# Altium PCB rectifier_buck_pcb.PcbDoc
Units mil, origin at the board's own origin, x right, y up, seen from the top; angles counter-clockwise.
Board outline 4645.67 x 3725 mil, 2 copper layers (Top Layer, Bottom Layer); 34 components, 20 nets, 108 pads, 7 vias.
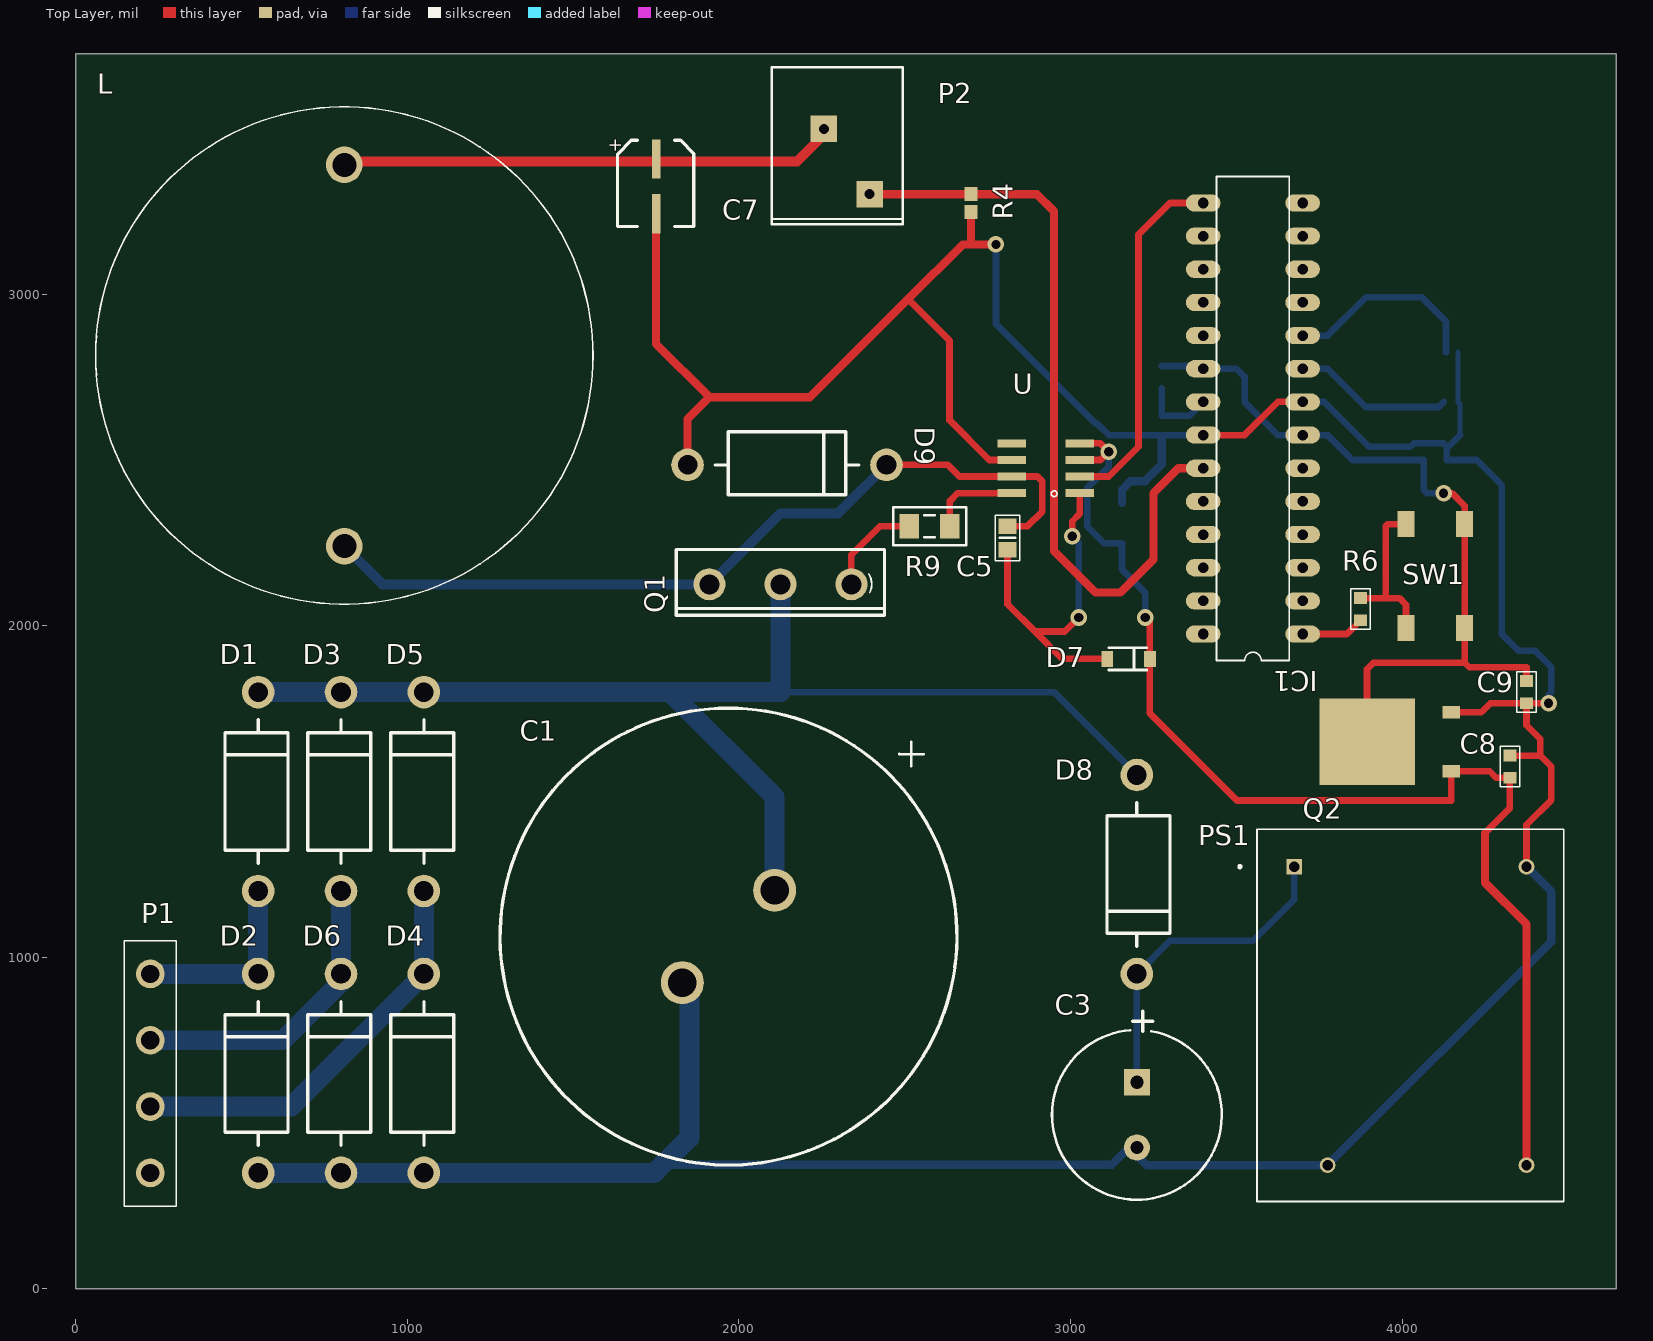
[diagram p0: Top Layer view]
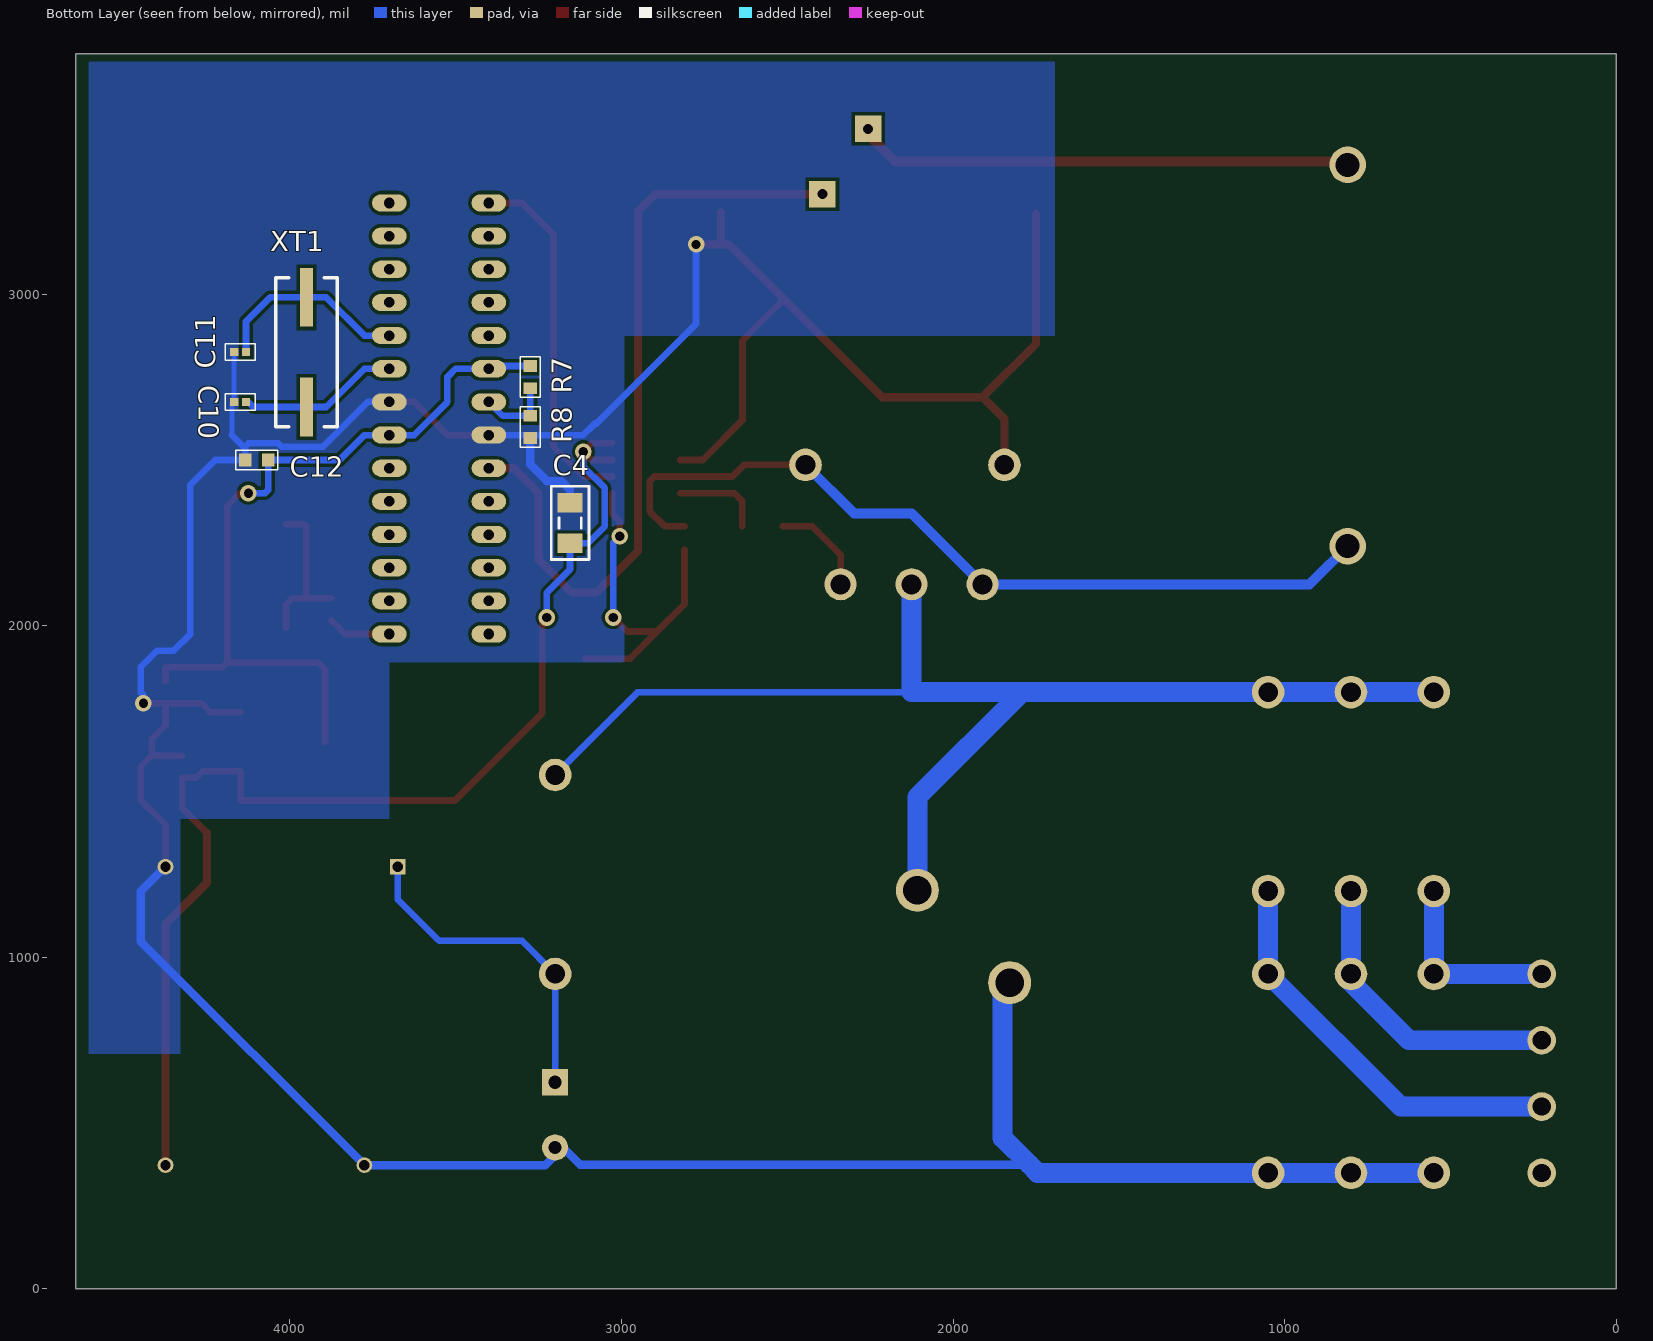
[diagram p1: Bottom Layer view, seen from below]
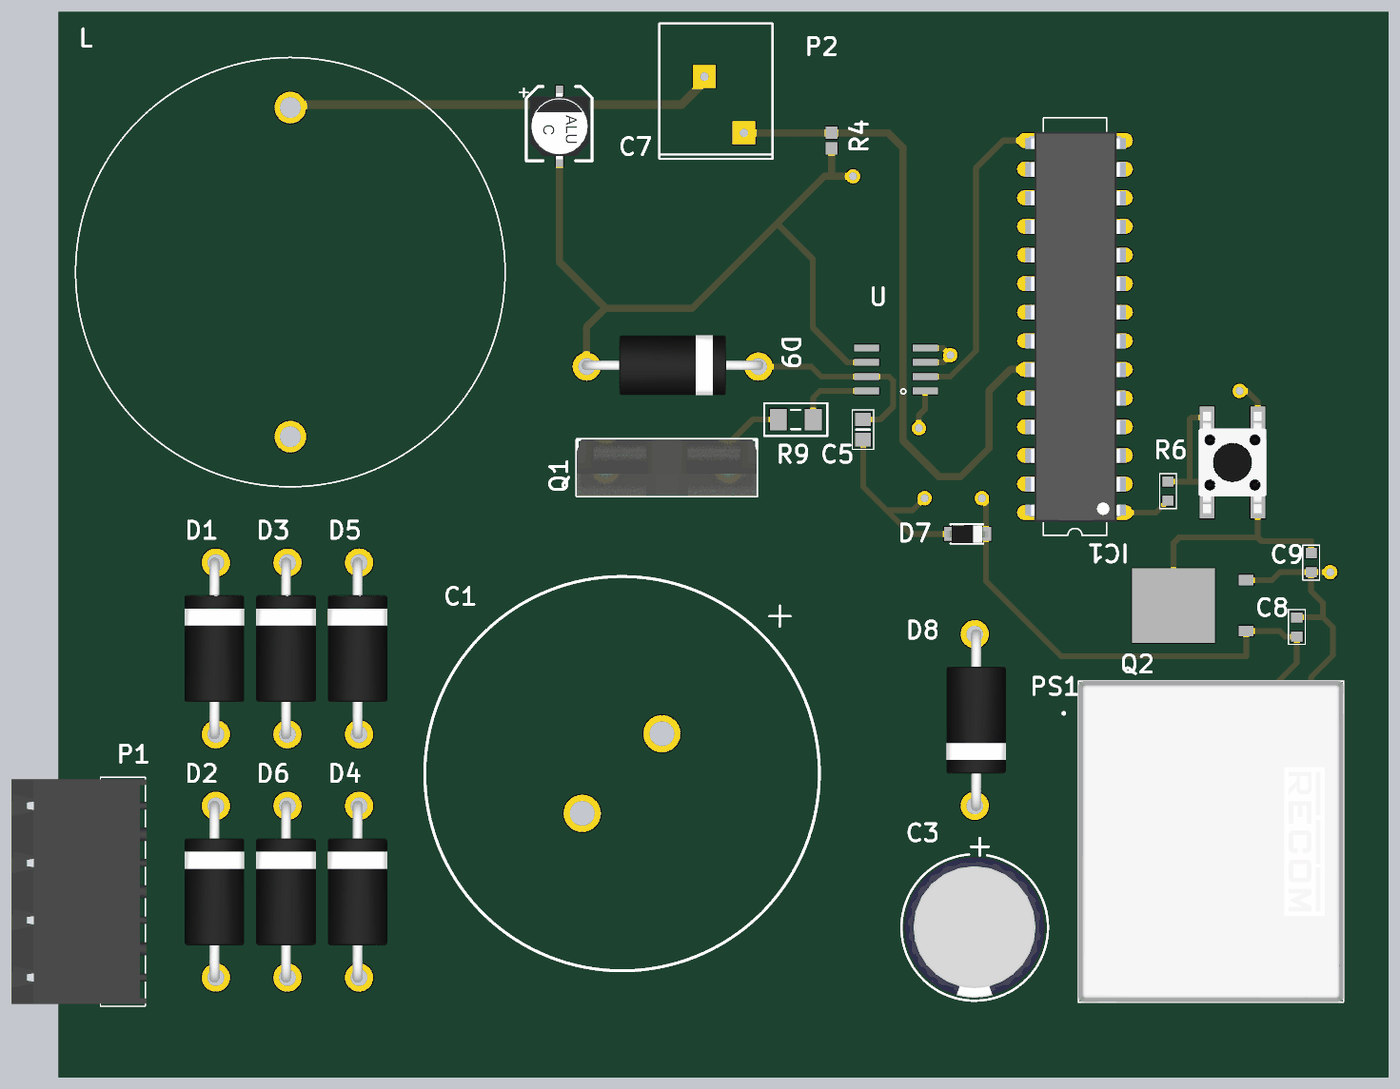
[diagram p2: 3D render of the assembled board from above, using the file's embedded part models]
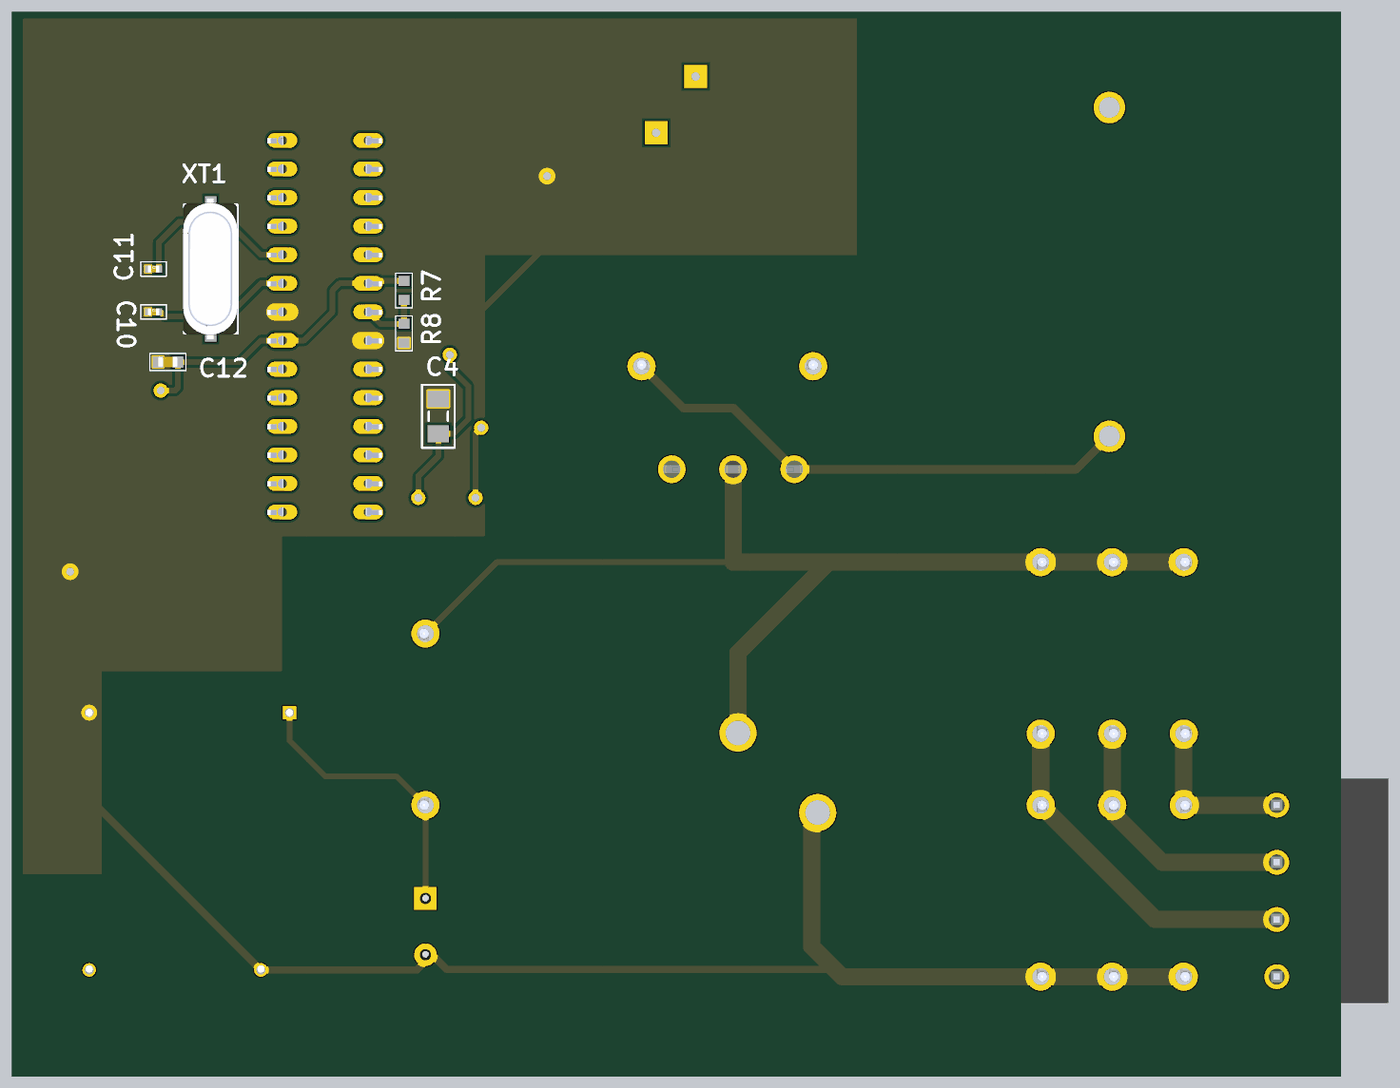
[diagram p3: 3D render of the assembled board from below, using the file's embedded part models]

## Layer stack, top to bottom
Top Solder: solder mask 0.4, Solder Resist, Dk 3.5
Top Layer: signal copper 1.4
Dielectric 1: dielectric 12.6, FR-4, Dk 4.8
Bottom Layer: signal copper 1.4
Bottom Solder: solder mask 0.4, Solder Resist, Dk 3.5

## Board outline
0,0 4645.67,0 4645.67,3725 0,3725

## Design rules (kind name [scope] priority, off if disabled: settings)
Clearance [All] p1: gap=10
Height [All] p1: minheight=0 maxheight=3937.01 prefheight=500
MinimumSolderMaskSliver [All] p1: minsoldermaskwidth=3
PlaneConnect [All] p1: planeconnectstyle=Relief reliefexpansion=10 reliefentries=4 reliefconductorwidth=10 reliefairgap=10
PolygonConnect [All] p1: connectstyle=Direct reliefconductorwidth=10 reliefentries=4 polygonreliefangle="90 Angle" airgapwidth=10
RoutingVias [All] p1: holewidth=28 width=50 viastyle="Through Hole" minholewidth=28 minwidth=50 maxholewidth=28 maxwidth=50
SolderMaskExpansion [All] p1: expansion=4
UnpouredPolygon [All] p1: allowunpoured=FALSE
Width [All] p1: maxlimit=100 minlimit=10 preferedwidth=30
26 further rules are at their usual default settings.

## Classes and differential pairs
component class Rectifier: C1 D1 D2 D3 D4 D5 D6 P1
component class Buck: C3 C4 C5 C7 C8 C9 C10 C11 C12 D7 D8 D9 IC1 L P2 PS1 Q1 Q2 R4 R6 R7 R8 R9 SW1 U U1 XT1

## Components (designator, comment, footprint, x,y, rotation, side; value= is the part's Value field where it differs from the comment)
C1 "ESMQ401VSN821MA45S" ESMQ401VSN821MA45S 1968.5,1062.99 r90 top
C3 "EEUED2G220" CAP-12.25X25 3200,525 r270 top
C4 "MC1206B106K160CT" 1206 3155,2310 r90 bottom
C5 "C2012X7R1C225K" 0805 2810,2265 r90 top
C7 "CAP ALUM 22UF 20% 35V SMD 5X5.3X5.4" RAD5.3X5.3X5.0 1750,3325 r180 top
C8 "*Value" 0603 4325,1575 r270 top
C9 "*Value" 0603 4375,1800 r90 top
C10 "CAP CER 22PF 5% 50V NP0 SMD 0402" C0402N 4150,2675 r180 bottom
C11 "CAP CER 22PF 5% 50V NP0 SMD 0402" C0402N 4150,2825 r180 bottom
C12 "CAP CER 0.1UF 10% 16V X7R SMD 0603" C0603N 4100,2500 r0 bottom
D1 "DIODE GEN PURP 400V 3A DO201AD - 1N5404" DO201AD 550,1500 r90 top
D2 "DIODE GEN PURP 400V 3A DO201AD - 1N5404" DO201AD 550,650 r90 top
D3 "DIODE GEN PURP 400V 3A DO201AD - 1N5404" DO201AD 800,1500 r90 top
D4 "DIODE GEN PURP 400V 3A DO201AD - 1N5404" DO201AD 1050,650 r90 top
D5 "DIODE GEN PURP 400V 3A DO201AD - 1N5404" DO201AD 1050,1500 r90 top
D6 "DIODE GEN PURP 400V 3A DO201AD - 1N5404" DO201AD 800,650 r90 top
D7 "MMSZ4699T1G-12V" SOD123 3175,1900 r180 top
D8 "DIODE GEN PURP 400V 3A DO201AD - 1N5404" DO201AD 3200,1250 r270 top
D9 "DIODE GEN PURP 400V 3A DO201AD - 1N5404" DO201AD 2145,2485 r0 top
IC1 "ATMEGA328-PU" DIL28 3550,2625 r180 top
L "1140-152K-RC" INDRD2921W163D3810H2616P 810,2815 r90 top
P1 "CTB9358/4AO" CTB9350/4AO 225,650 r270 top
P2 "Konnektör" 250-202 2325,3400 r0 top
PS1 "RAC03-12SK" CONV_RAC03-12SK 4025,825 r0 top
Q1 "LSIC1MO120E0080" TO-247-3L 2125,2125 r180 top
Q2 "L78M12ABDT" TO225P972X240-3N 3900,1650 r90 top
R4 "PE0603FRF070R1L" RESC1507X55N 2700,3275 r270 top
R6 "ERJ3GEYJ103V" 0603 3875,2050 r90 top
R7 "Resistor" 0603 3275,2750 r90 bottom
R8 "MC0063W06031100K" 0603 3275,2600 r270 bottom
R9 "*Value" 1206 2575,2300 r180 top
SW1 "SWITCH TACTILE" SWITCH_TACHTILE_SMD 4100,2150 r270 top
U "NCP3420" SO08 2925,2475 r90 top
XT1 "CRYSTAL 16MHZ 18PF" "XTAL_11.4MMX 4.7MM" 3950,2825 r90 bottom

## Footprints (in the part's own frame and the unit in brackets; to place one, negate y for a bottom-side part, rotate by r counter-clockwise, add the part's x,y. Pads: shape width x height; smd on the part's side, far side on the other; paste and mask are expansions set on the pad)
250-202 [mil] "2 pos wago power connector"
  rect 80x80 hole 30 mask+3.94: 1(-68.9,98.43) 2(68.9,-98.43)
  silkscreen extent -226,-189 169,284, body extent -230,-192 172,288, height 520
0603 [mm] "Chip Resistor, Body 1.6x0.8mm, IPC Medium Density"
  rect 0.9x1 smd: 1(-0.85,0) 2(0.85,0)
  silkscreen extent -1.55,-0.75 1.55,0.75, body extent -0.85,-0.48 0.85,0.48, height 0.6
0805 [mm] "Chip Resistor, Body 2.0x1.3mm, IPC Medium Density"
  rect 1.2x1.4 smd: 1(-0.9,0) 2(0.9,0)
  silkscreen extent -1.75,-0.95 1.75,0.95, body extent -1.07,-0.7 1.07,0.7, height 0.65
1206 [mm] "Chip Component, Body 3.2x1.6mm, IPC Low Density"
  rect 1.5x1.9 smd: 1(-1.55,0) 2(1.55,0)
  silkscreen extent -2.8,-1.45 2.8,1.45, body extent -1.68,-0.87 1.68,0.87, height 0.71
C0402N [mm] "Chip Capacitor, Body 1.0x0.5mm, IPC Medium Density"
  rect 0.62x0.62 smd: 1(-0.45,0) 2(0.45,0)
  silkscreen extent -1.14,-0.64 1.14,0.64, body extent -0.5,-0.3 0.5,0.3, height 0.2
C0603N [mm] "Chip Capacitor, 0603, Body 1.6x0.8mm, IPC Medium Density"
  rect 0.95x1 smd: 1(-0.875,0) 2(0.875,0)
  silkscreen extent -1.6,-0.76 1.6,0.76, body extent -0.89,-0.48 0.88,0.47, height 0.98
CAP-12.25X25 [mm] "Capacitor; 2 Leads,5 mm lead distance"
  rect 2x2 hole 1: 1(-2.5,0)
  round 2 hole 1: 2(2.5,0)
  silkscreen extent -7.93,-6.5 6.5,6.5, body extent -6.28,-6.27 6.22,6.23, height 25.49
CONV_RAC03-12SK [mm]
  rect 1.2x1.2 hole 0.8: 1(-8.89,11.39)
  round 1.2 hole 0.8: 2(-6.35,-11.47) 3(8.89,-11.47) 4(8.89,11.39)
  silkscreen extent -13.16,-14.25 11.75,14.25, body extent -11.75,-14.25 11.75,14.25, height 17.9
CTB9350/4AO [mm] "4 position pluggable termial(90 degree)"
  round 2.2 hole 1.4: 1(-7.62,0) 2(-2.54,0) 3(2.54,0) 4(7.62,0)
  silkscreen extent -10.16,-2 10.16,2, body extent -9.97,-9.9 9.95,2.1, height 9
DIL28 [mil]
  oval 104x52 hole 32: 1(-150,650) 2(-150,550) 3(-150,450) 4(-150,350) 5(-150,250) 6(-150,150) 7(-150,50) 8(-150,-50) 9(-150,-150) 10(-150,-250) 11(-150,-350) 12(-150,-450) 13(-150,-550) 14(-150,-650) 15(150,-650) 16(150,-550) 17(150,-450) 18(150,-350) 19(150,-250) 20(150,-150) 21(150,-50) 22(150,50) 23(150,150) 24(150,250) 25(150,350) 26(150,450) 27(150,550) 28(150,650)
  silkscreen extent -110,-730 110,730, body extent -202,-681 198,684, height 180
DO201AD [mm]
  round 2.5 hole 1.5: 1(-7.62,0) 2(7.62,0)
  silkscreen extent -5.5,-2.29 5.5,2.54, body extent -8.05,-2.52 8.05,2.78, height 5.35
ESMQ401VSN821MA45S [mm] "ESMQ401VSN821MA45S"
  round 3.3 hole 2.2: 1(3.536,-3.535) 2(-3.535,3.536)
  silkscreen extent -17.51,-17.5 17.49,17.5, body extent -17.5,-17.49 17.5,17.49, height 49
INDRD2921W163D3810H2616P [mm]
  round 2.8 hole 1.85: 1(-14.605,0) 2(14.605,0)
  silkscreen extent -19.05,-19.05 19.05,19.05, body extent -18.9,-19.01 19.05,19.01, height 26.16
RAD5.3X5.3X5.0 [mm] "Capacitor, Electrolytic, Radial; Body 6.3 x 12.5 mm (Dia.xH typ); Pin Spacing 2.5 mm (typ)"
  rect 0.65x3 smd: 1(0,-2.1) 2(0,2.1)
  silkscreen extent -2.9,-3.53 2.95,3.07, body extent -2.65,-2.95 2.65,2.95, height 5.41
RESC1507X55N [mm]
  rect 1.08x1.02 smd: 1(-0.701,0) 2(0.701,0)
SO08 [mm]
  rect 0.6x2.2 smd: 1(-1.905,-2.6) 2(-0.635,-2.6) 3(0.635,-2.6) 4(1.905,-2.6) 5(1.905,2.6) 6(0.635,2.6) 7(-0.635,2.6) 8(-1.905,2.6)
  silkscreen extent -2.17,-0.87 -1.73,-0.43
SOD123 [mm] "SOD-123; 2 Leads; Body 2.7 x 1.6 mm, (LxW)"
  rect 0.91x1.22 smd: 1(-1.635,0) 2(1.635,0)
  silkscreen extent -1.39,-0.85 1.51,0.85, body extent -1.82,-0.78 1.88,0.82, height 1.27
SWITCH_TACHTILE_SMD [mm]
  rect 2x1.3 smd: 1(-3.975,2.25) 2(3.975,2.25) 3(-3.975,-2.25) 4(3.975,-2.25)
  body extent -4.5,-3 4.5,3, height 5
TO225P972X240-3N [mil]
  rect 37x52 smd: 1(-89,-248) 3(89,-248)
  rect 260x288 smd: 2(0,6)
TO-247-3L [mm] "3L-pad"
  round 2.46 hole 1.53: 1(-5.44,0) 2(0,0) 3(5.44,0)
  silkscreen extent -7.97,-2.67 7.98,2.36, body extent -7.97,-2.67 7.98,2.36, height 31
"XTAL_11.4MMX 4.7MM" [mm] "MPN:MCRSD16000F183000RR"
  rect 4.5x1 smd: 1(-4.2,0) 2(4.2,0)
  silkscreen extent -5.7,-2.35 5.7,2.35, body extent -6.23,-2.35 6.27,2.45, height 4.02

## Part data
C1: "CAP ALUM 820UF 20% 400V SNAP"
C3: "22 uF Electrlytic capacitor"
C4: "10 uF X7R Ceremic Capacitor"
C5: "2.2 uF X7R Ceremic Capacitor"
C8 C9: library part C0603C104K3RACTU, "0.1uF X7R Ceramic Capacitor"
D1 D2 D3 D4 D5 D6 D8 D9: "DIODE GEN PURP 400V 3A DO201AD"
D7: library part MMSZ4699T1G, "DIODE ZENER 12V 500MW SOD123"
IC1: "AVR AVR® ATmega Microcontroller IC 8-Bit 20MHz 32KB _16K x 16_ FLASH 28-PDIP"
L: "1.5mH Unshielded Wirewound Inductor 2.9A 324mOhm Max Radial"
P1: "4 pos plýggable terminal"
P2: library part 250-202, "2 pos power connector"
PS1: "Enclosed AC DC Converters 1 Uitgang 12V 250mA 85 ~ 264 VAC, 120 ~ 370 VDC Input"
Q1: "LittleFuse SIC mosfet"
Q2: "Linear Voltage Regulator IC 1 Output 500mA DPAK"
R6: "10k ohm 0603 package resistor"
R7: library part MC0063W060311M, "1 MEG ohm 0603 package resistor"
R8: "100Kohm 0603package resistor"
R9: library part MC0125W12061100R, "100 ohm 1206 package resistor"
SW1: "SWITCH TACTILE (SPST NO) TOP ACTUATED SURFACE MOUNT"
U: "ON Semiconductor TSMC 12V FET DRVR"

## Via types
v1: diameter 50, hole 28, Top Layer to Bottom Layer, 7 vias

## Nets (pads, with @x,y where several pads share a name; then routed paths per layer and width w, separated by ;. In a path a pad name is that pad's centre, name@x,y a point inside that pad or via, vN(x,y) a via of type N, cw(c..) or ccw(c..) an arc to the next point about the centre after c; other vN are vias at no path point)
5V: C9.2 C12.1 IC1.7 IC1.20 Q2.2 R7.2 SW1.1 SW1.2 | length 2413.5
  Top Layer w20: Q2.2 3894,1869 3913.58,1888.58 4188.58,1888.58 ; v1(4125,2400) 4150,2400 4188.58,2361.42 SW1.1 SW1.2 4188.58,1888.58 ; C9.2 4375,1875 4202.17,1875 4188.58,1888.58
  Bottom Layer w20: R7.2 3391.54,2783.46 IC1.20 3500,2775 3525,2750 3525,2675 3625,2575 IC1.7 3775,2575 3850,2500 C12.1 4065.55,2409.45 4075,2400 v1(4125,2400)
12V: C4.1 C8.2 D7.1 PS1.3 Q2.1 U.3 U.4 | length 3663.8
  Top Layer w20: U.3 3090,2500 v1(3115,2525) 3090,2550 U.4 ; v1(3225,2025) 3239.37,2010.63 D7.1 3239.37,1735.63 3502,1473 4148,1473 Q2.1 4264,1561 4283.46,1541.54 C8.2 4325,1450 4250,1375
  Top Layer w25: 4250,1375 4250,1225 4375,1100 PS1.3
  Bottom Layer w20: v1(3115,2525) 3115,2480 3050,2415 3050,2300 3101.02,2248.98 C4.1 3155,2170 3225,2100 v1(3225,2025)
CURRENTSENSE: IC1.23 P2.2 R4.1 | length 2377.6
  Top Layer w25: P2.2 2698.98,3301.57 R4.1 2701.44,3301.16 2898.84,3301.16 2950,3250 2950,2225 3075,2100 3150,2100 3250,2200 3250,2400 3325,2475 IC1.23
GND: C1.2 C3.2 C4.2 C7.2 C8.1 C9.1 C10.1 C11.1 C12.2 D2.1 D4.1 D6.1 D9.1 IC1.8 IC1.22 PS1.2 PS1.4 Q2.3 R4.2 R8.2 U.6 | length 12087.3
  Top Layer w20: 2510,2985 2635,2860 2635,2620 2755,2500 U.6 ; IC1.22 3525,2575 3625,2675 IC1.8 ; Q2.3 4239,1739 4266.54,1766.54 C9.1 ; C8.1 4416.54,1608.46 ; PS1.4 4375,1400 4450,1475 4450,1575 4416.54,1608.46 ; v1(4441.54,1766.54) C9.1 ; C9.1 4375,1700 4416.54,1658.46 4416.54,1608.46
  Top Layer w25: C7.2 1750,2850 1910.83,2689.17 ; D9.1 1845,2623.35 1910.83,2689.17 ; R4.2 2700,3150 ; v1(2775,3150) 2700,3150 ; 1910.83,2689.17 2214.17,2689.17 2510,2985 2675,3150 2700,3150
  Bottom Layer w15: C11.1 C10.1 4174.49,2668.23 4174.49,2574.49
  Bottom Layer w20: v1(2775,3150) 2775,2910 3075.2,2609.8 3080.2,2609.8 3115,2575 IC1.22 ; IC1.8 3765,2675 3900,2540 4024.74,2540 4034.74,2550 4125,2550 4134.45,2540.55 ; 4174.49,2574.49 4140.55,2540.55 4134.45,2540.55 ; v1@4450,1775 v1(4441.54,1766.54) 4441.54,1791.54 4450,1800 4450,1875 4400,1925 4350,1925 4300,1975 4300,2425 4225,2500 C12.2 4134.45,2540.55
  Bottom Layer w25: 1769.88,375 3125,375 3176.57,426.57 3229.72,373.43 PS1.2 4450,1048.43 4450,1198.43 PS1.4 ; C4.2 3155,2410 3181.02,2436.02 3225,2436.02 3275,2486.02 R8.2
  Bottom Layer w60: D2.1 D6.1 D4.1 1744.88,350 1769.88,375 1850.39,455.51 C1.2@1850.39,905.51
HIN: IC1.15 U.2 | length 1089.3
  Top Layer w20: U.2 3115,2450 3205,2540 3205,3180 3300,3275 IC1.15
NetC3_1: C3.1 D8.2 PS1.1 | length 993.2
  Bottom Layer w20: C3.1 D8.2 3300,1050 3550,1050 3675,1175 PS1.1
NetC5_1: C5.1 D7.2 U.1 | length 1076.2
  Top Layer w20: C5.1 2810,2065 2892.5,1982.5 ; v1(3005,2270) 3005,2315 3027.36,2337.36 U.1 ; v1(3025,2025) 2982.5,1982.5 2892.5,1982.5 ; D7.2 2975,1900 2892.5,1982.5
  Bottom Layer w20: v1(3005,2270) 3025,2250 v1(3025,2025)
NetC5_2: C5.2 D9.2 L.1 Q1.3 U.7 | length 2550.1
  Top Layer w20: D9.2 2630,2485 2665,2450 U.7 2900,2450 2915,2435 2915,2345 2870.43,2300.43 C5.2
  Bottom Layer w30: L.1@800,2250 925,2125 Q1.3 2125,2339.17 2299.17,2339.17 D9.2
NetC7_1: C7.1 L.2 P2.1 | length 1489.7
  Top Layer w30: L.2@800,3400 2175,3400 P2.1@2256.1,3481.1
NetC10_2: C10.2 IC1.9 XT1.1 | length 479.7
  Bottom Layer w20: IC1.9 3775,2775 3890.35,2659.65 XT1.1 4110.16,2659.65 C10.2@4125.51,2675
NetC11_2: C11.2 IC1.10 XT1.2 | length 602.9
  Bottom Layer w20: IC1.10 3775,2875 3890.35,2990.35 XT1.2 4059.65,2990.35 4132.28,2917.72 C11.2
NetD1_1: D1.1 D2.2 P1.1 | length 575
  Bottom Layer w60: P1.1 D2.2 D1.1
NetD3_1: D3.1 D6.2 P1.2 | length 897.5
  Bottom Layer w60: P1.2 625,750 D6.2@800,925 ; D6.2 D3.1
NetD4_2: D4.2 D5.1 P1.3 | length 1240.7
  Bottom Layer w60: P1.3 650,550 D4.2 D5.1
NetIC1_1: IC1.1 R6.1 | length 192.2
  Top Layer w20: IC1.1 3833.46,1975 R6.1
NetIC1_21: IC1.21 R7.1 R8.1 | length 225.3
  Bottom Layer w20: R7.1 R8.1 3358.46,2633.46 IC1.21
NetQ1_1: Q1.1 R9.2 | length 299.5
  Top Layer w20: Q1.1 2339.17,2214.17 2425,2300 R9.2
NetR6_2: R6.2 SW1.3 SW1.4 | length 495.4
  Top Layer w20: R6.2 3950,2083.46 ; SW1.4 4011.42,2063.58 3991.54,2083.46 3950,2083.46 ; SW1.3 3956.5,2306.5 3950,2300 3950,2083.46
NetR9_1: R9.1 U.8 | length 272.6
  Top Layer w20: R9.1 2636.02,2376.02 2660,2400 U.8
VDC: C1.1 D1.2 D3.2 D5.2 D8.1 Q1.2 | length 3807.6
  Bottom Layer w20: 2125,1800 2950,1800 D8.1
  Bottom Layer w60: D1.2 D3.2 D5.2 1790.87,1800 ; C1.1 2107.7,1483.17 1790.87,1800 ; Q1.2 2125,1800 1790.87,1800
pads on no net: IC1.2 IC1.3 IC1.4 IC1.5 IC1.6 IC1.11 IC1.12 IC1.13 IC1.14 IC1.16 IC1.17 IC1.18 IC1.19 IC1.24 IC1.25 IC1.26 IC1.27 IC1.28 P1.4 U.5

## Polygon pours and split planes (outlines as drawn)
GND on Bottom Layer "GND" (solid, pour order 2): 1692.91,3700.79 1692.91,2874.02 2992.13,2874.02 2992.13,2283.46 2992.13,1889.76 3700.79,1889.76 3700.79,1417.32 4330.71,1417.32 4330.71,708.66 4606.3,708.66 4606.3,3700.79

## Silkscreen, mask and mechanical layers (free items; w line width, h text height)
Mechanical 1:
  the board outline again, w10

## Text inside footprints (layer, text, board x,y; h text height)
C7: Top Overlay "+" at 1610,3471 h39.37 r270